# EAGLE board BLE Bee v1.0 (EAGLE 6.4)
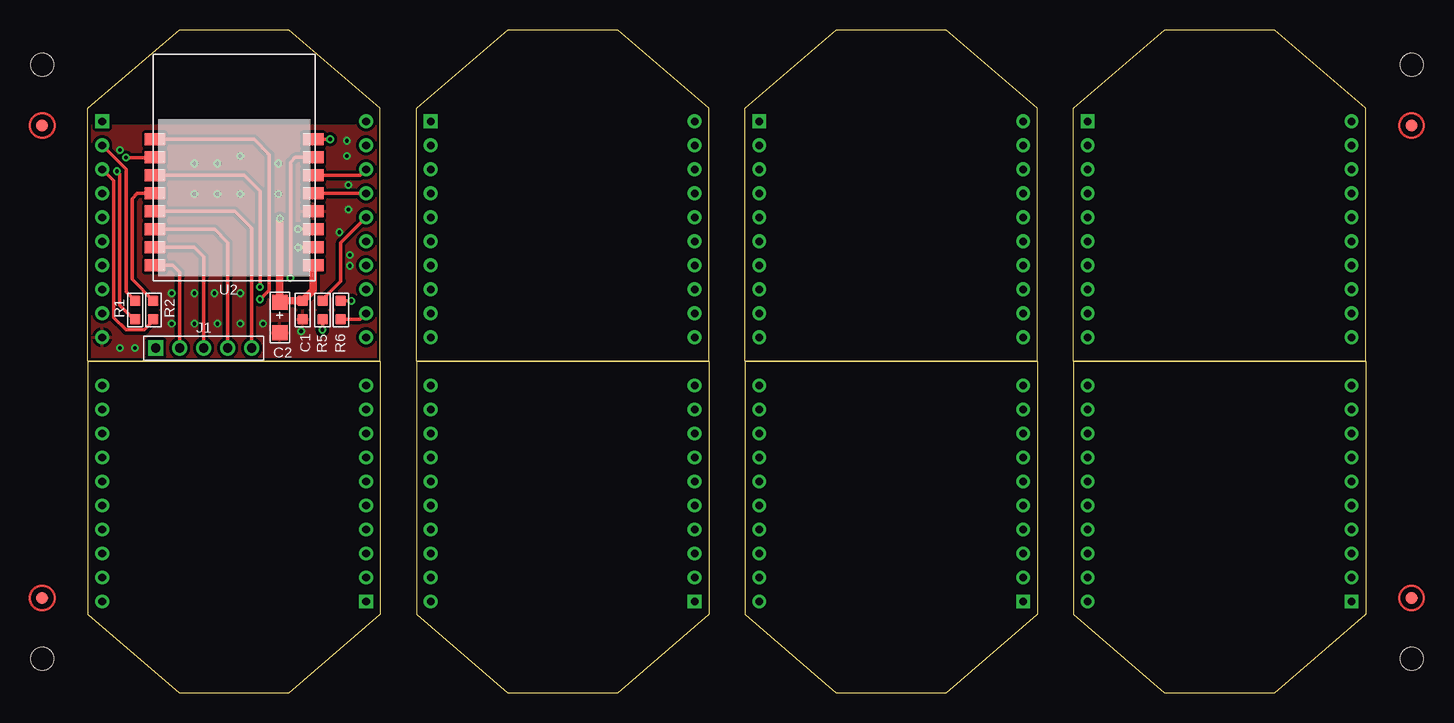
[diagram p0: board, top side]
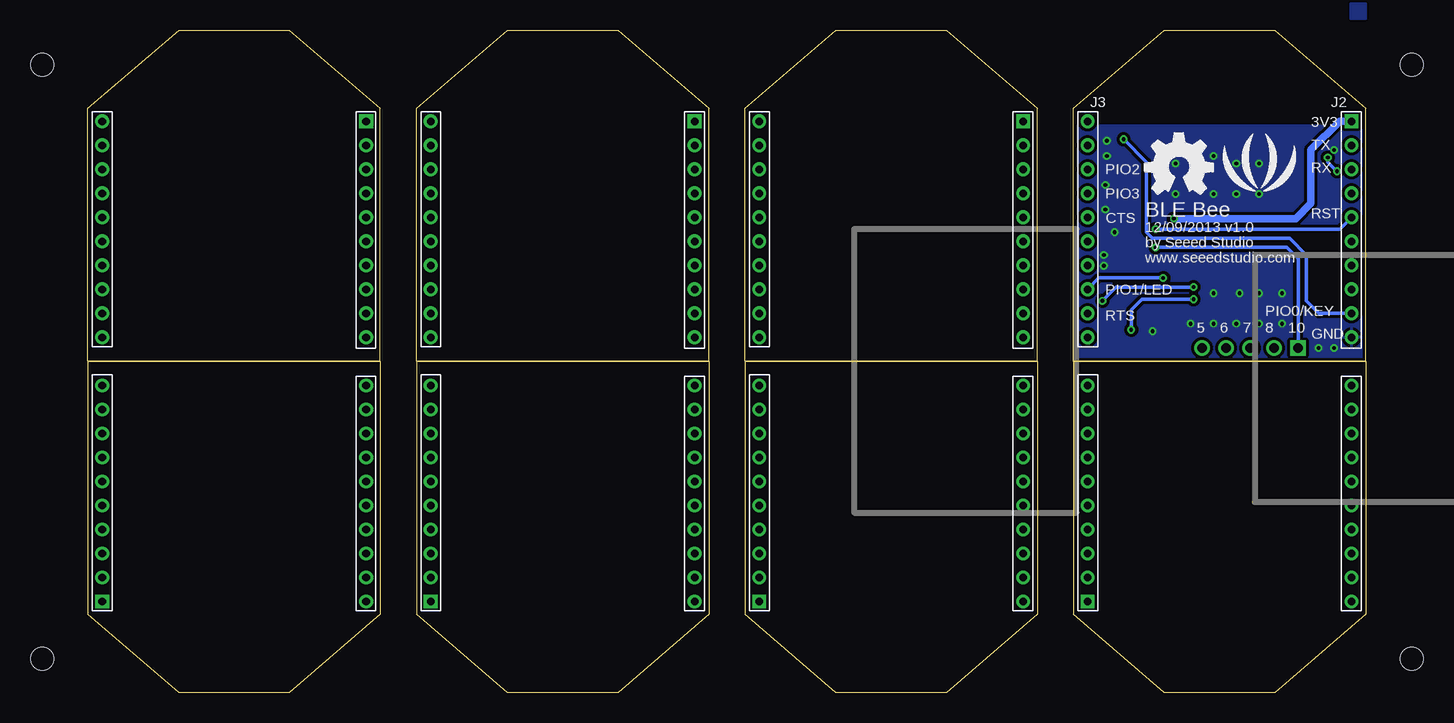
[diagram p1: board, bottom side, seen from below]

Size 106.53 x 55.23 mm. Coordinates in mm from the lower left corner, seen from the top.
Copper layers (1*16): Top 0.035mm / dielectric 1.5mm / Bottom 0.035mm
Design rules "SeeedStudio_DRU_no_angle_20130527 *": minimum track width 6mil, minimum drill 12mil, track to track 6mil, track to pad 6mil, pad to pad 6mil, via to via 6mil, smd to smd 0mil, copper to edge 10mil, drill to drill 10mil, minimum pad ring 10mil, minimum via ring 6mil, stop-mask expansion 2mil, vias tented up to drill 25mil, thermal gap 10mil
Net classes: 0 default: width 0.152 mm, drill 0.305 mm, clearance 0.152 mm
Holes 1.91 mm at -3.81,2.82 -3.81,52.35 110.34,2.82 110.34,52.35
tKeepout: area -16.4,31.6 to 17.9,44.9; area 17,31 to 51.3,44.2
tRestrict: area 12.2,12.7 to 12.3,17.9
bRestrict: area 12.2,12.7 to 12.3,17.9

## Footprints (pad centres in the part's own frame; a part is rotated, then mirrored left to right if it is on the bottom)
C0603 = smd 0.889 x 0.889: 1 -0.762,0; 2 0.762,0
AVX-A = smd 1.27 x 1.27: + -1.27,0; - 1.27,0
5P-2.0 = drill 0.762 pad 1.27 square: 1 0,4 | drill 0.762 pad 1.27: 2 0,2; 3 0,0; 4 0,-2; 5 0,-4
ROUND-MARK-1.0 = smd 1.016 x 1.016: P$1 0,0
R0603 = smd 0.889 x 0.889: 1 -0.762,0; 2 0.762,0
20P-DIP-2.0 = drill 0.635 pad 1.016 square: 1 -11,6.195 | drill 0.635 pad 1.016: 2 -11,4.195; 3 -11,2.195; 4 -11,0.195; 5 -11,-1.805; 6 -11,-3.805; 7 -11,-5.805; 8 -11,-7.805; 9 -11,-9.805; 10 -11,-11.805; 11 11,-11.805; 12 11,-9.805; 13 11,-7.805; 14 11,-5.805; 15 11,-3.805; 16 11,-1.805; 17 11,0.195; 18 11,2.195; 19 11,4.195; 20 11,6.195
16P-18.5X13.5X0.8 = smd 1.7 x 1: 1 -6.6,2.15; 2 -6.6,0.65; 3 -6.6,-0.85; 4 -6.6,-2.35; 5 -6.6,-3.85; 6 -6.6,-5.35; 7 -6.6,-6.85; 8 -6.6,-8.35; 9 6.6,-8.35; 10 6.6,-6.85; 11 6.6,-5.35; 12 6.6,-3.85; 13 6.6,-2.35; 14 6.6,-0.85; 15 6.6,0.65; 16 6.6,2.15

## Placement (x,y rotation side)
C1  100nF  [C0603]  17.91,31.9 270 top
C2  10uF/10v  [AVX-A]  16,31.27 270 top
J1  [5P-2.0]  9.65,28.73 90 top
P1  [ROUND-MARK-1.0]  -3.81,7.9 0 top  (outside the outline)
P2  [ROUND-MARK-1.0]  110.34,7.9 0 top  (outside the outline)
P3  [ROUND-MARK-1.0]  -3.81,47.27 0 top  (outside the outline)
P4  [ROUND-MARK-1.0]  110.34,47.27 0 top  (outside the outline)
R1  1K  [R0603]  3.93,31.9 90 top
R2  1K  [R0603]  5.46,31.9 270 top
R5  1K  [R0603]  19.56,31.9 270 top
R6  1K  [R0603]  21.08,31.9 90 top
U1  [20P-DIP-2.0]  12.19,41.43 0 top
U2  HM-11  [16P-18.5X13.5X0.8]  12.19,43.97 0 top
U3  [20P-DIP-2.0]  39.57,41.43 0 top
U4  [20P-DIP-2.0]  66.96,41.43 0 top
U5  [20P-DIP-2.0]  94.34,41.43 0 top
U6  [20P-DIP-2.0]  12.19,13.8 180 top
U7  [20P-DIP-2.0]  39.57,13.8 180 top
U8  [20P-DIP-2.0]  66.96,13.8 180 top
U9  [20P-DIP-2.0]  94.34,13.8 180 top
U$2  [LOGO_SILK]  8.89,43.46 0 bottom
U$3  [OSHW_FILLX200_NOTEXT]  18.41,41.55 0 bottom

## Library data of the parts
C1 C2 R1 R2 R5 R6 = Discrete
J1 = Connector 
P1-P4 = Discrete; PARTNO: DNP
U1 U3-U9 = moudle
U2 = template
U$2 U$3 = Logo

## Nets
CTS: R6.1 U1.12
CTS1: R6.2 U2.3
GND: C1.2 C2.- U1.10 U2.12
KEY: U1.9 U2.16
LED: U1.13 U2.15
NC5: J1.5 U2.5
NC6: J1.4 U2.6
NC7: J1.3 U2.7
NC8: J1.2 U2.8
NC10: J1.1 U2.10
PIO2: U1.18 U2.14
PIO3: U1.17 U2.13
RESET: U1.5 U2.11
RTS: R5.1 U1.16
RTS1: R5.2 U2.1
RXD: R2.2 U1.3
RXD1: R2.1 U2.4
TXD: R1.2 U1.2
TXD1: R1.1 U2.2
VCC_3V3: C1.1 C2.+ U1.1 U2.9

## Tracks (layer width: path | path; a pad name or v marks a point on that pad's centre or on a via)
CTS
  Top 0.305: R6.1 22.71,31.14 U1.12
CTS1  (via drill 0.3 pad 0.64)
  Top 0.305: v14.35,33.81 14.35,41.81 13.04,43.12 U2.3 | v21.97,32.66 R6.2
  Bottom 0.305: v14.35,33.81 20.83,33.81 v21.97,32.66
GND  (via drill 0.3 pad 0.64)
  other vias: 8.89,30.76 8.89,33.3 10.54,33.3 10.79,30.76 12.7,33.3 12.7,30.76 6.98,33.3 6.98,30.76 17.78,30.12 14.6,30.76 2.66,45.24 21.59,44.73 21.59,46 21.71,42.32 8.89,44.09 10.79,44.09 12.7,44.73 8.89,41.55 10.79,41.55 12.7,41.55 2.66,28.73 3.93,28.73 21.71,40.28 15.87,44.09 15.87,41.55 20.95,38.38 21.84,36.47 21.84,35.59
  pour Bottom: 0,57.43 1.27,57.43 1.27,56.16 0,56.16
  pour Bottom (isolate 0.254): 0,27.58 24.38,27.58 24.38,47.27 0,47.27
  pour Top (isolate 0.254): 0,27.58 24.38,27.58 24.38,47.27 0,47.27
KEY  (via drill 0.3 pad 0.64)
  Top 0.305: v20.19,46.13 18.78,46.13 U2.16
  Bottom 0.305: U1.9 3.91,31.62 4.95,32.66 4.95,36.47 6.35,37.87 17.78,37.87 18.29,38.38 18.29,44.22 v20.19,46.13
LED  (via drill 0.3 pad 0.64)
  Top 0.305: v16.89,34.57 16.89,44.22 17.28,44.62 U2.15
  Bottom 0.305: U1.13 22.24,34.57 v16.89,34.57
NC5
  Top 0.305: J1.5 13.65,38.7 12.23,40.12 U2.5
NC6
  Top 0.305: J1.4 11.65,37.52 10.55,38.62 U2.6
NC7
  Top 0.305: J1.3 9.65,36.35 8.88,37.12 U2.7
NC8
  Top 0.305: J1.2 7.65,35.05 7.08,35.62 U2.8
NC10  (via drill 0.3 pad 0.64)
  Top 0.305: v17.52,37.11 U2.10
  Bottom 0.305: J1.1 5.65,36.16 6.6,37.11 v17.52,37.11
PIO2
  Top 0.305: U2.14 22.69,43.12 U1.18
PIO3
  Top 0.305: U2.13 U1.17
RESET  (via drill 0.3 pad 0.64)
  Top 0.305: v17.52,38.63 18.77,38.63 U2.11
  Bottom 0.305: v17.52,38.63 2.18,38.63 U1.5
RTS
  Top 0.305: R5.1 19.56,32.79 21.08,34.32 21.08,37.51 U1.16
RTS1  (via drill 0.3 pad 0.64)
  Top 0.305: U2.1 13.85,46.12 15.11,44.86 15.11,33.55 v14.35,32.79 | v19.56,30.25 R5.2
  Bottom 0.305: v14.35,32.79 18.67,32.79 19.56,31.9 v19.56,30.25
RXD
  Top 0.305: R2.2 5.46,31.01 4.7,30.25 3.17,30.25 2.16,31.27 2.16,42.66 U1.3
RXD1
  Top 0.305: R2.1 3.68,34.44 3.68,41.17 4.12,41.62 U2.4
TXD
  Top 0.305: R1.2 3.17,33.43 3.17,43.64 U1.2
TXD1  (via drill 0.3 pad 0.64)
  Top 0.305: R1.1 3.81,31.14 2.66,32.28 2.66,43.21 v2.41,43.46 | v3.17,44.6 5.57,44.6 U2.2
  Bottom 0.305: v3.17,44.6 3.17,44.22 v2.41,43.46
VCC_3V3  (via drill 0.3 pad 0.64)
  Top 0.61: U2.9 18.79,33.55 C1.1 16.13,32.66 C2.+ v16,39.52
  Bottom 0.61: U1.1 2.18,47.62 4.57,45.24 4.57,40.79 5.84,39.52 v16,39.52

## Text on the board
bPlace: J2 | J3 | 3V3 | TX | RX | PIO2 | PIO3 | RST | BLE Bee | CTS | 12/09/2013 v1.0 | by Seeed Studio | www.seeedstudio.com | PIO1/LED | PIO0/KEY | RTS | GND | 10 | 8 | 7 | 6 | 5